# Altium PCB lab1.PcbDoc
Units mm, origin at the board's own origin, x right, y up, seen from the top; angles counter-clockwise.
Board outline 50 x 40 mm, 4 copper layers (Top Layer, GND1, GND2, Bottom Layer), stack 1.527 mm thick; 34 components, 13 nets, 74 pads, 402 vias.
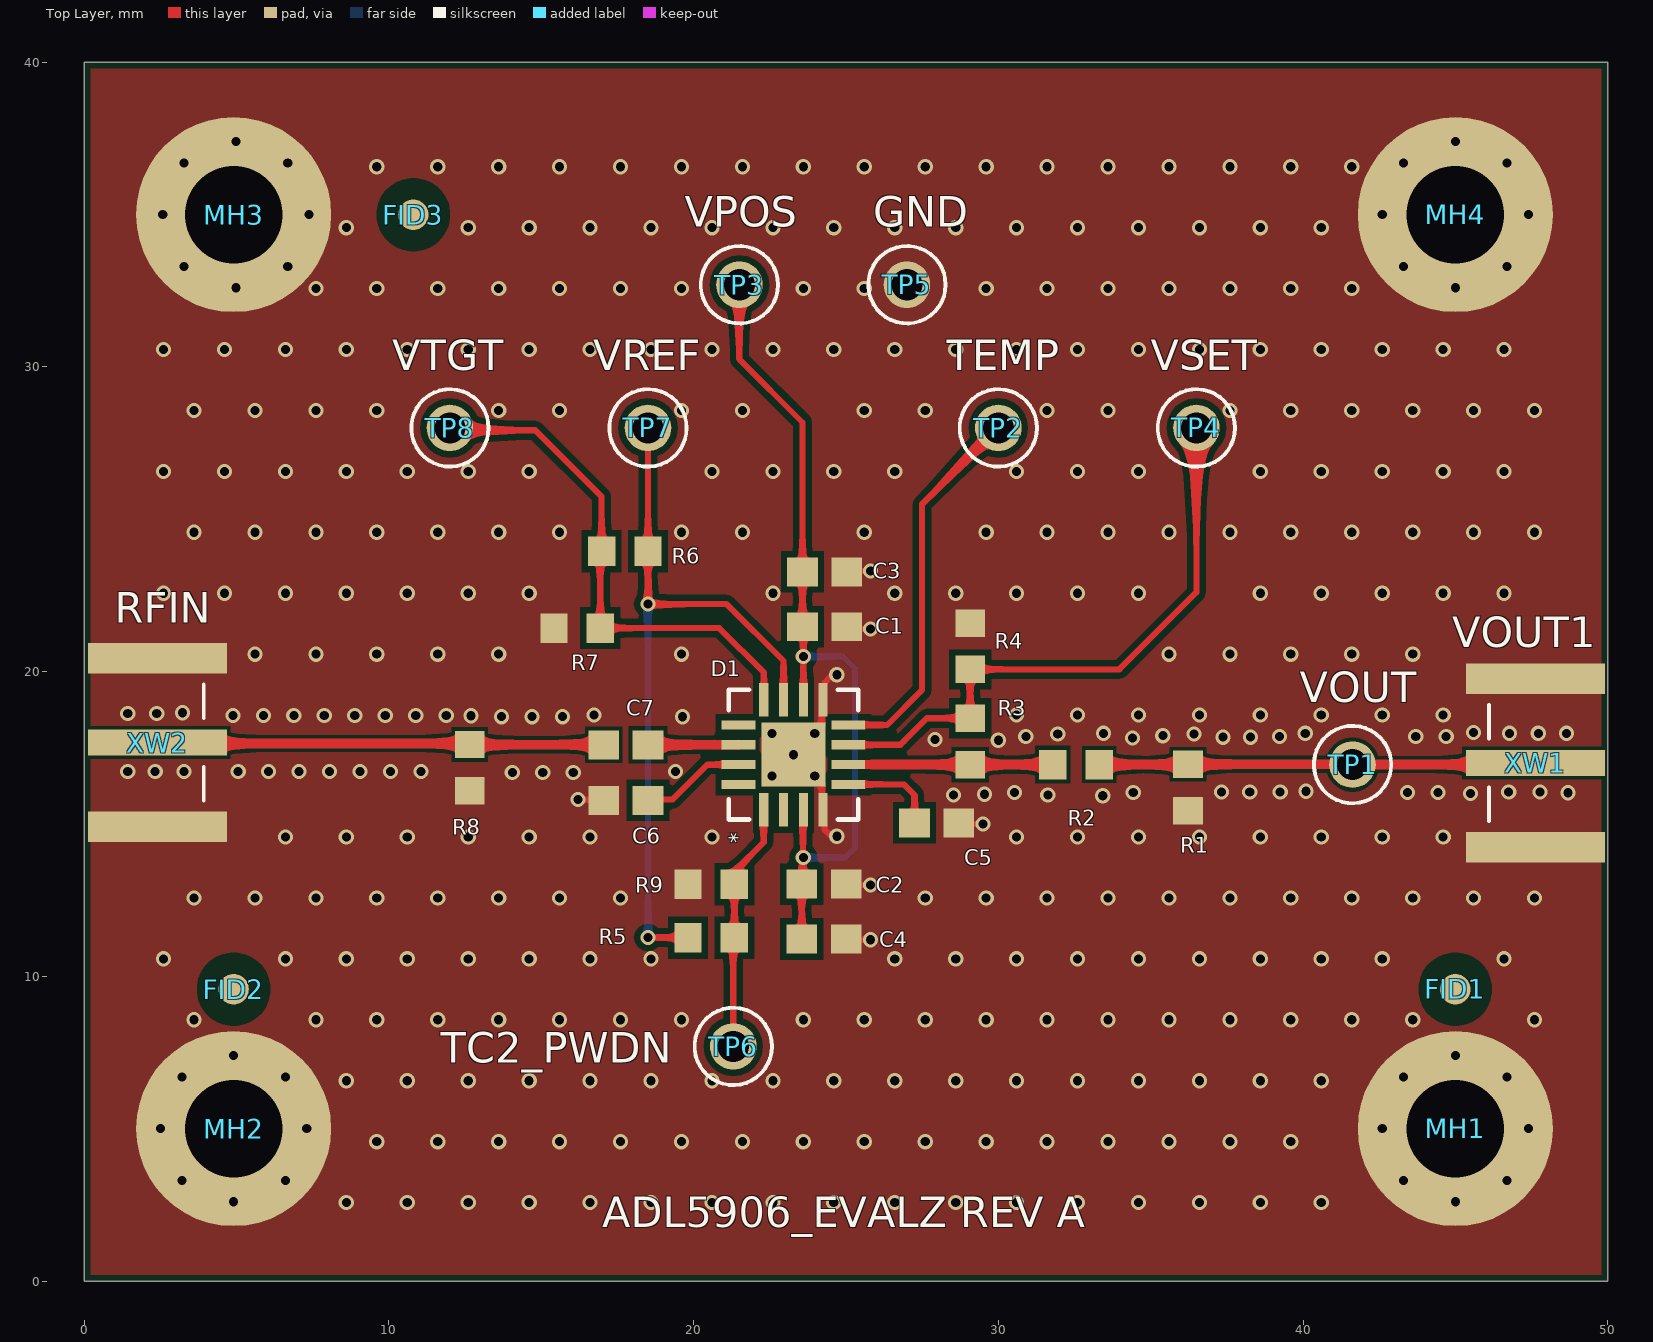
[diagram p0: Top Layer view]
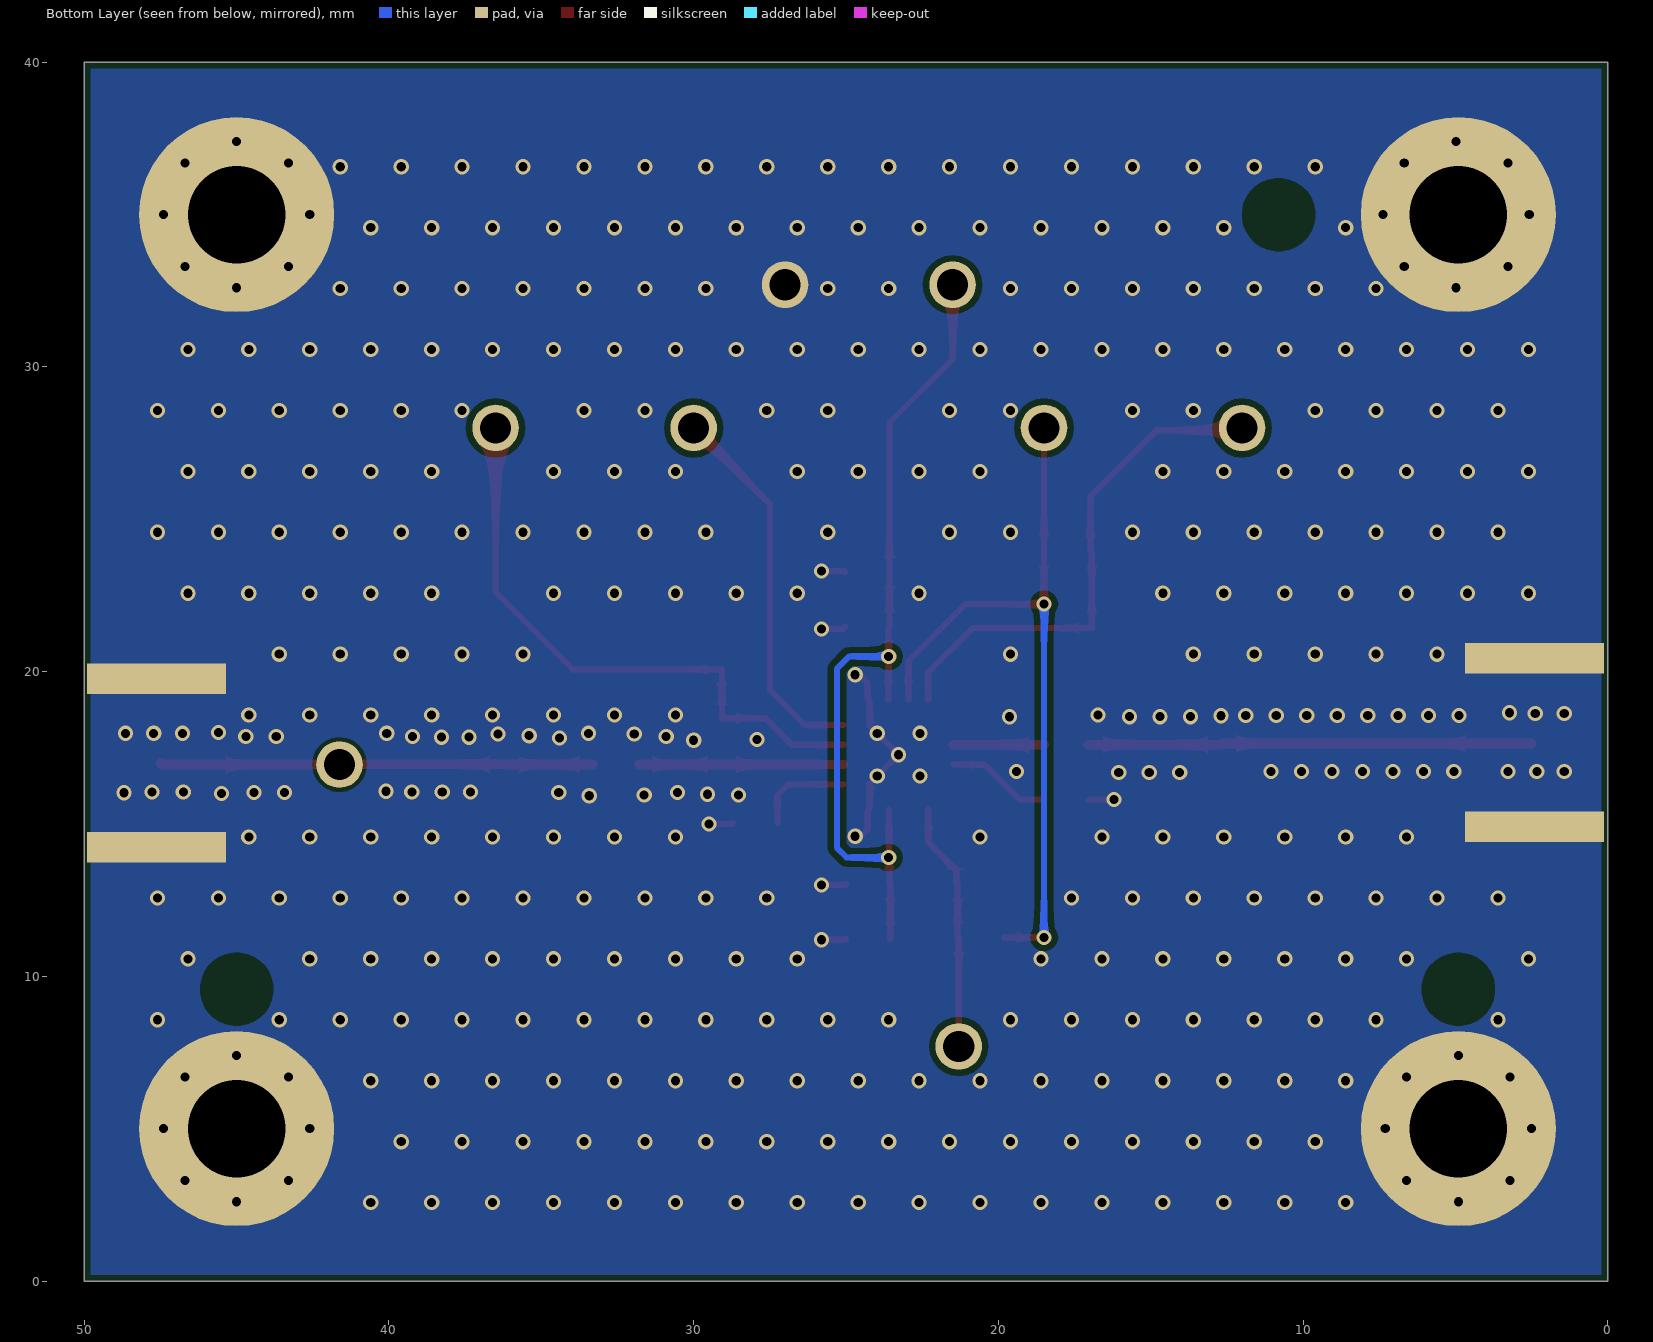
[diagram p1: Bottom Layer view, seen from below]
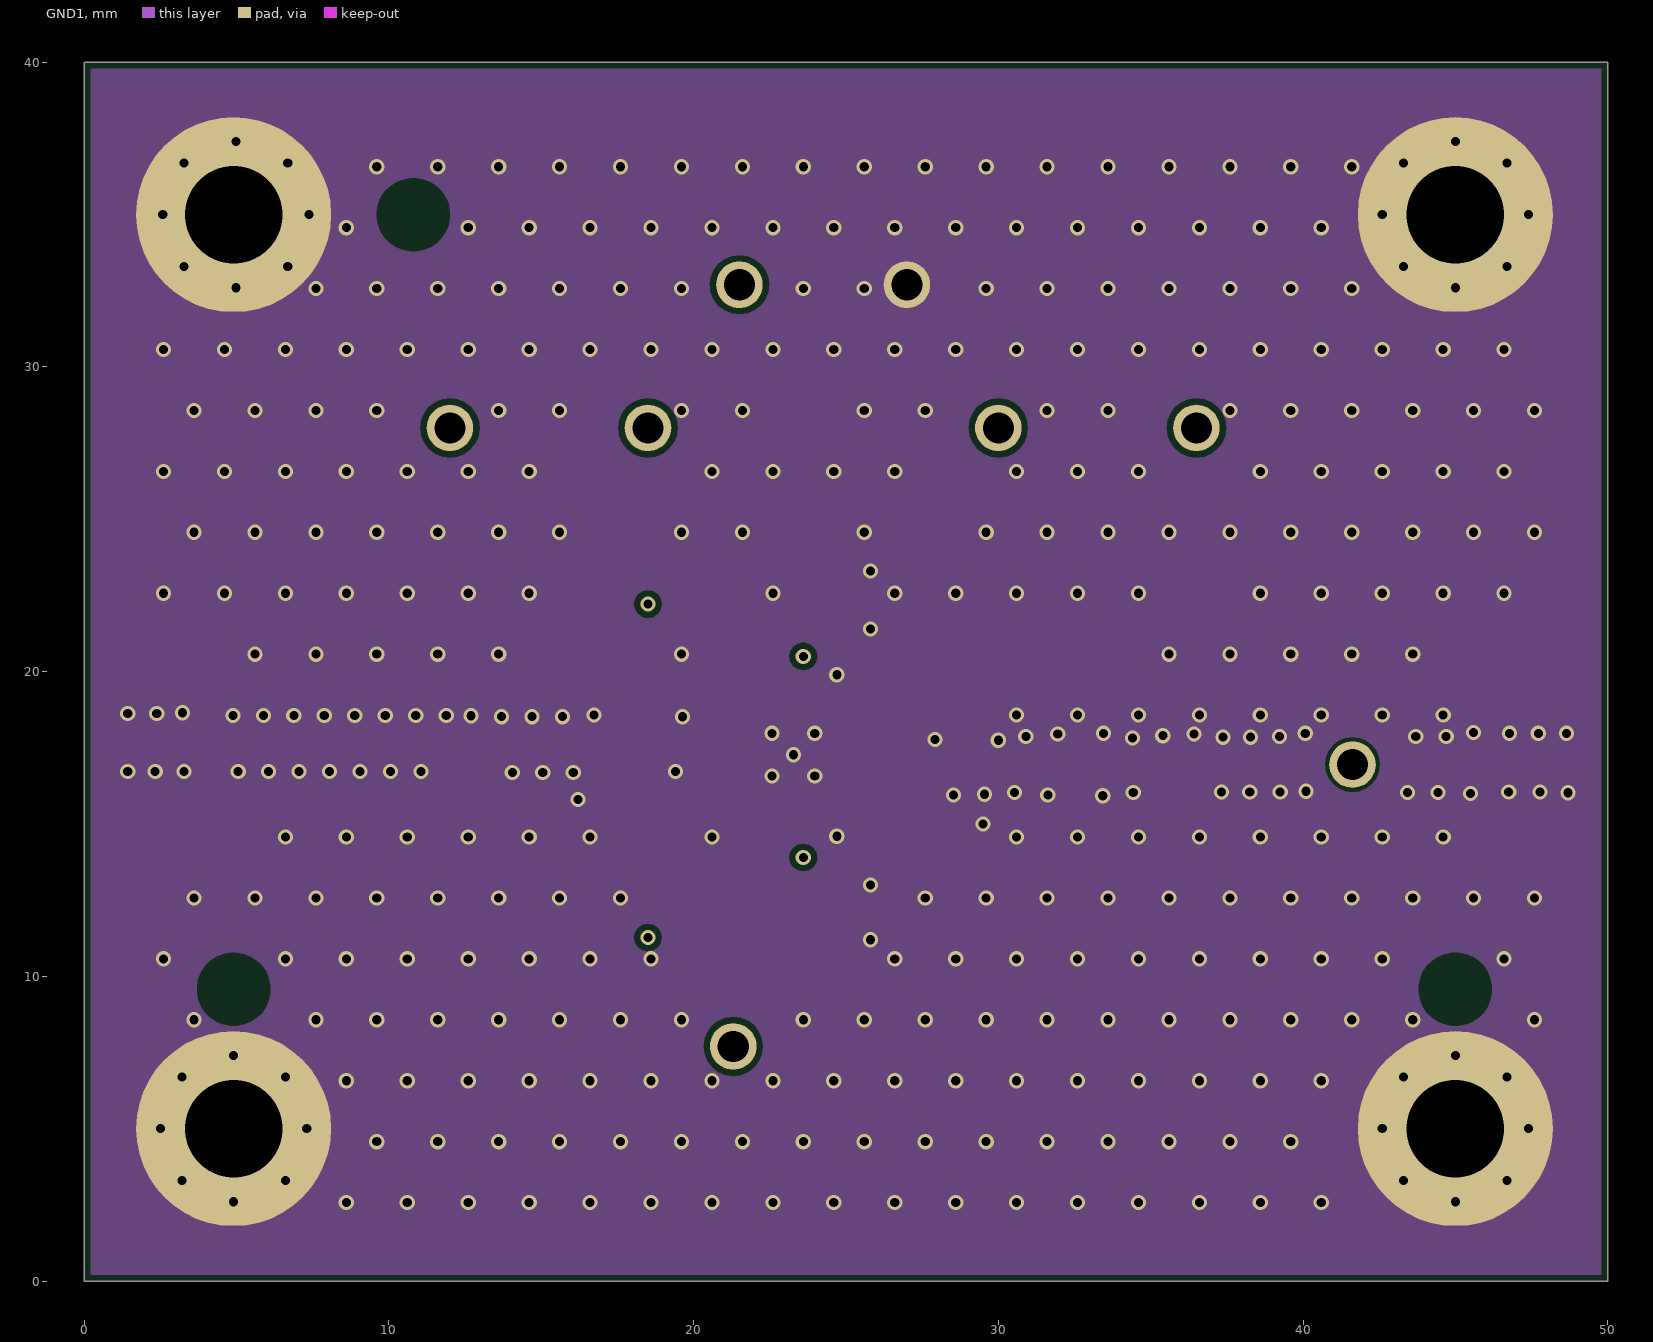
[diagram p2: GND1]
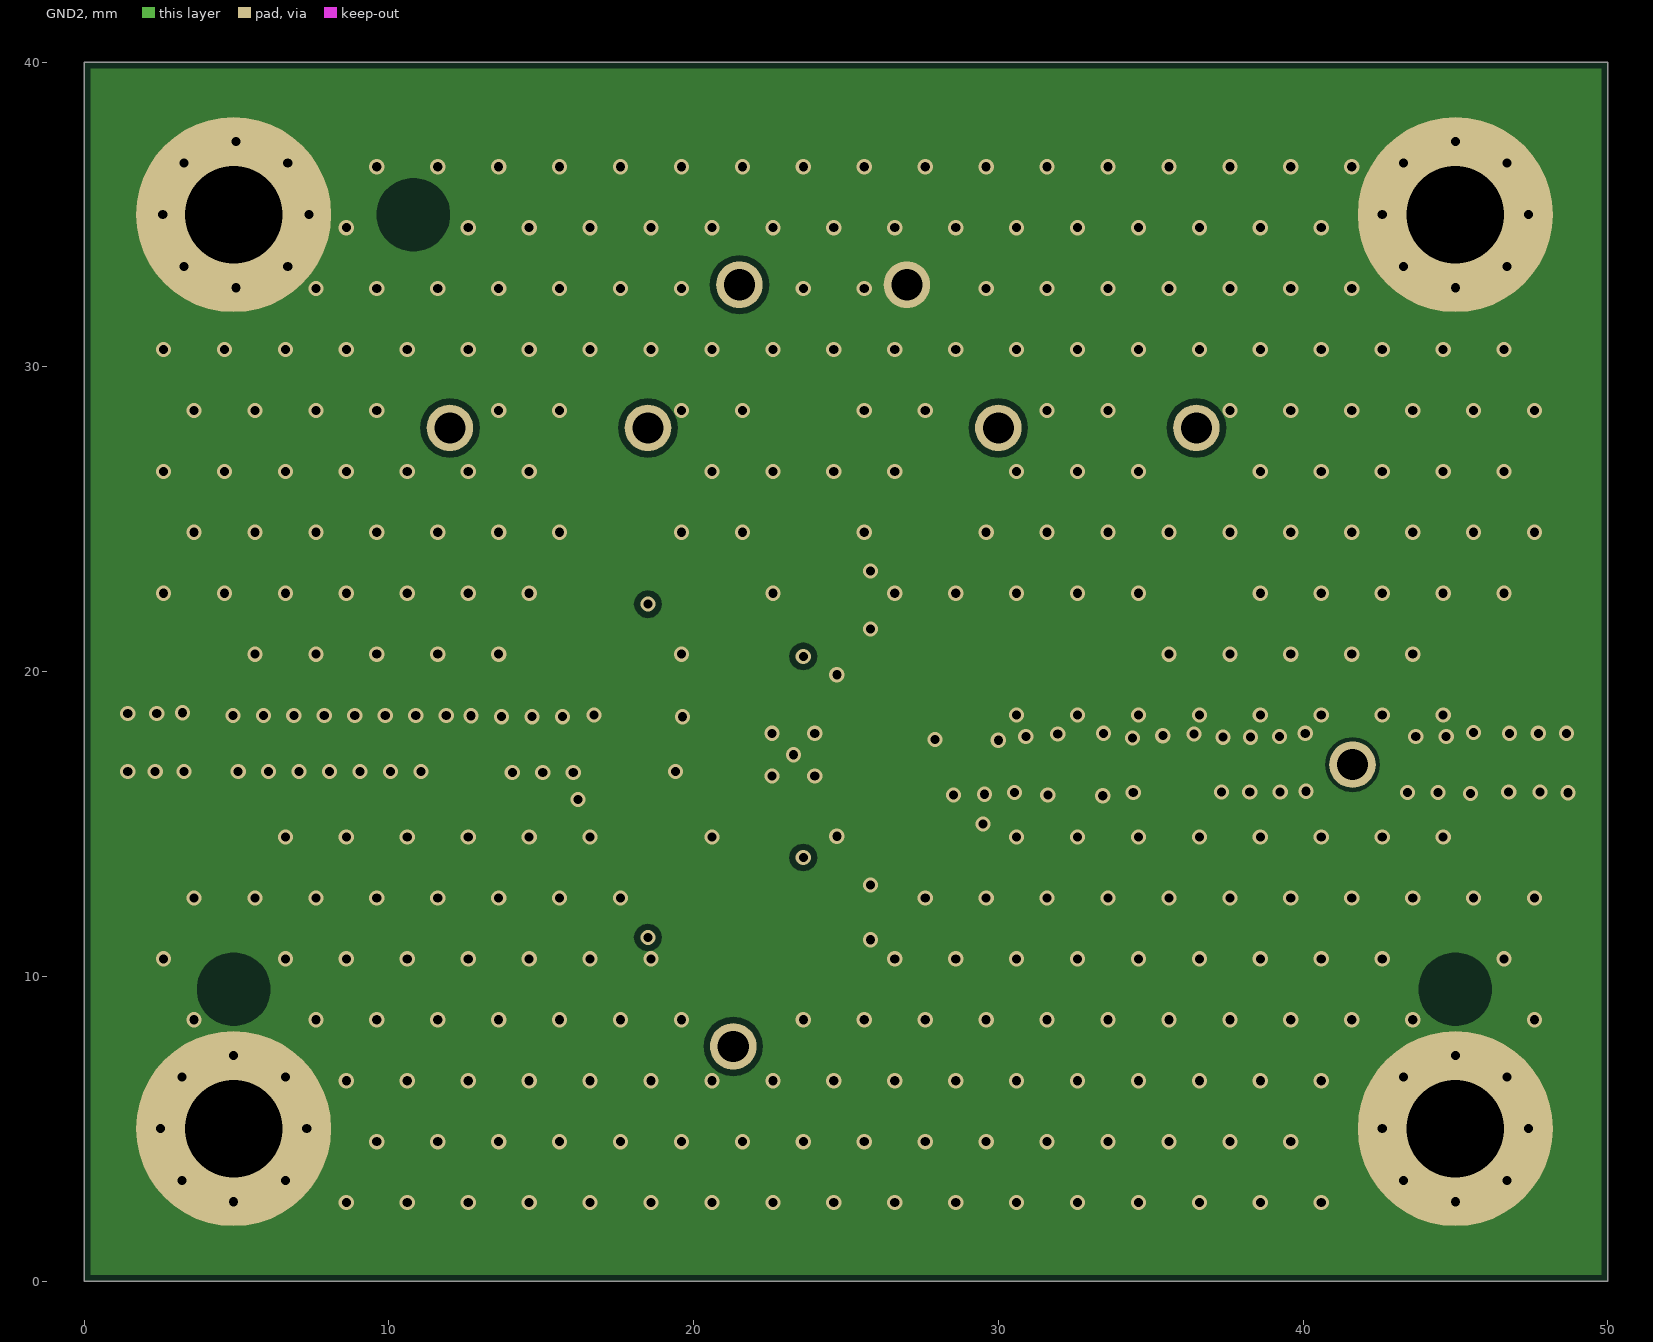
[diagram p3: GND2]
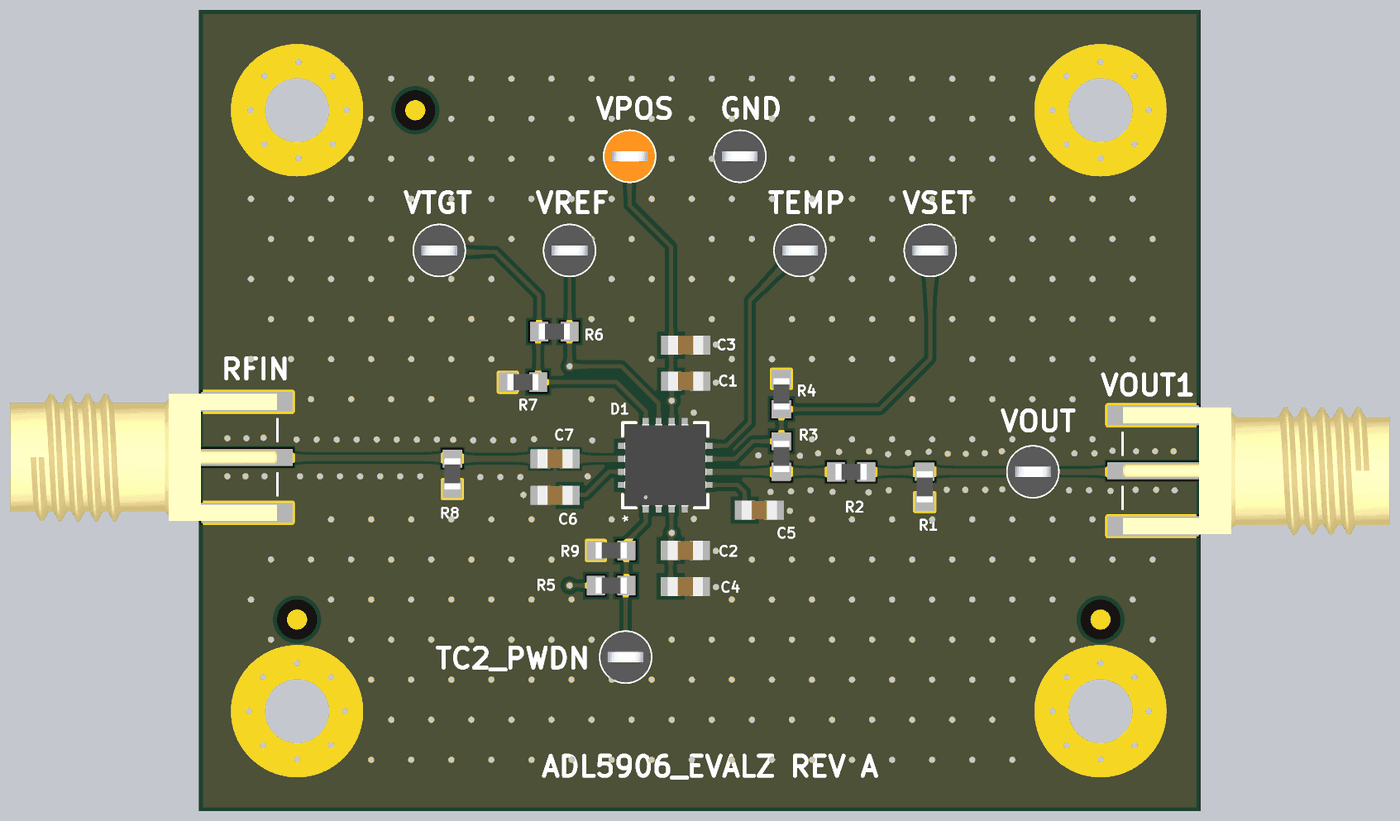
[diagram p4: 3D render of the assembled board from above, using the file's embedded part models]

## Layer stack, top to bottom
Top Solder: solder mask 0.0102, Solder Resist, Dk 3.5
Top Layer: signal copper 0.053
Dielectric 2: core 0.2032, R04003C, Dk 3.38
GND1: signal copper 0.035
Dielectric 1: core 0.9448, FR-4, Dk 3.8
GND2: signal copper 0.035
Dielectric 3: core 0.2032, R04003C, Dk 3.38
Bottom Layer: signal copper 0.053
Bottom Solder: solder mask 0.0102, Solder Resist, Dk 3.5

## Board outline
0,0 50,0 50,40 0,40

## Design rules (kind name [scope] priority, off if disabled: settings)
BoardOutlineClearance [All] p1: gap=0.2 ignorepadtopadclearanceinfootprint=FALSE except(0.09: SMDPad-OutlineEdge)
Clearance Clearance_50Ohm [InNetClass('50 Ohm')] p1: gap=0.127 ignorepadtopadclearanceinfootprint=TRUE
Clearance [All] p2: gap=0.2 ignorepadtopadclearanceinfootprint=TRUE
ComponentClearance [All] p1: gap=0 collisioncheckmode=3 verticalgap=0 showdistances=FALSE
HoleSize [All] p1: absolutevalues=TRUE maxlimit=5 minlimit=0.3 maxpercent=80.000 minpercent=20.000
MinimumSolderMaskSliver [All] p1: minsoldermaskwidth=0
PolygonConnect [All] p1: connectstyle=Direct reliefconductorwidth=0.254 reliefentries=4 polygonreliefangle="90 Angle" airgapwidth=0.254
RoutingVias [All] p1: holewidth=0.5 width=1 viastyle="Through Hole" minholewidth=0.3 minwidth=0.5 maxholewidth=2 maxwidth=3
SolderMaskExpansion [All] p1: expansion=0.102 istentingtop=FALSE
Width Width_50Ohm [InNetClass('50 Ohm')] p1: maxlimit=0.319 minlimit=0.299 preferedwidth=0.319 impedanceprofiledriven=TRUE impedanceprofileid={6ED3B86D-760E-42CB-A985-9C33CF35A73C} impedanceprofilevalue=50.000000 minimp=50.000000 maximp=50.000000 favimp=50.000000
Width [All] p2: maxlimit=1 minlimit=0.15 preferedwidth=0.2
27 further rules are at their usual default settings.

## Classes and differential pairs
net class "50 Ohm": NetC7_1 NetC7_2 NetD1_6 VOUT

## Components (designator, comment, footprint, x,y, rotation, side; value= is the part's Value field where it differs from the comment)
C1 "CAP_0603_0.1uF" CAP_0603_0.1uF 24.3,21.475 r180 top value=0.1мкФ
C2 "CAP_0603_0.1uF" CAP_0603_0.1uF 24.275,13.025 r180 top value=0.1мкФ
C3 "CAP_0603_100pF" CAP_0603_100pF 24.3,23.275 r180 top value=100пФ
C4 "CAP_0603_100pF" CAP_0603_100pF 24.275,11.225 r180 top value=100пФ
C5 "CAP_0603_0.1uF" CAP_0603_0.1uF 27.975,15.035 r180 top value=0.1мкФ
C6 "CAP_0603_10nF" CAP_0603_10nF 17.775,15.775 r0 top value=10нФ
C7 "CAP_0603_10nF" CAP_0603_10nF 17.775,17.6 r0 top value=10нФ
D1 "ADL5906SCPZN-R7" ADL5906SCPZN-R7 23.275,17.275 r90 top
FID1 "Fiducial" "FIDUCIAL 1mm" 45,9.575 r90 top
FID2 "Fiducial" "FIDUCIAL 1mm" 4.9,9.575 r90 top
FID3 "Fiducial" "FIDUCIAL 1mm" 10.8,35 r90 top
MH1 "Mounting Hole M3" "Mounting Hole M3"#1 45,5 r0 top
MH2 "Mounting Hole M3" "Mounting Hole M3"#1 4.9,5 r0 top
MH3 "Mounting Hole M3" "Mounting Hole M3"#2 4.975,35 r0 top
MH4 "Mounting Hole M3" "Mounting Hole M3"#1 45,35 r0 top
R1 "RES_0603 0Ohm" "RES_0603 0Ohm" 36.225,16.2 r90 top value=0Ом
R2 "RES_0603 0Ohm" "RES_0603 0Ohm" 32.55,16.95 r180 top value=0Ом
R3 "RES_0603 0Ohm" "RES_0603 0Ohm" 29.075,17.71 r90 top value=0Ом
R4 "RES_0603 0Ohm" "RES_0603 0Ohm" 29.075,20.835 r270 top value=0Ом
R5 "RES_0603 1.5kOhm" "RES_0603 1.5kOhm" 20.575,11.27 r0 top value=1.5кОм
R6 "RES_0603 3.74kOhm" "RES_0603 3.74kOhm" 17.74,23.95 r0 top value=3.74кОм
R7 "RES_0603 2kOhm" "RES_0603 2kOhm" 16.175,21.43 r180 top value=2кОм
R8 "RES_0603 60.4Ohm" "RES_0603 60.4Ohm" 12.65,16.85 r270 top value=60.4Ом
R9 "RES_0603 270Ohm" "RES_0603 270Ohm" 20.575,13.025 r0 top value=270Ом
TP1 "Test point" "TEST POINT BLACK" 41.625,16.95 r0 top
TP2 "Test point" "TEST POINT BLACK" 30,28 r0 top
TP3 "Test point" "TEST POINT ORANGE" 21.5,32.7 r0 top
TP4 "Test point" "TEST POINT BLACK" 36.5,28 r0 top
TP5 "Test point" "TEST POINT BLACK" 27,32.7 r0 top
TP6 "Test point" "TEST POINT BLACK" 21.3,7.7 r0 top
TP7 "Test point" "TEST POINT BLACK" 18.5,28 r0 top
TP8 "Test point" "TEST POINT BLACK" 12,28 r0 top
XW1 "EMPCB.SMAFSTJ.B.HT" EMPCB.SMAFSTJ.B.HT 47.625,17 r90 top
XW2 "EMPCB.SMAFSTJ.B.HT" EMPCB.SMAFSTJ.B.HT 2.4,17.675 r270 top

## Footprints (in the part's own frame and the unit in brackets; to place one, negate y for a bottom-side part, rotate by r counter-clockwise, add the part's x,y. Pads: shape width x height; smd on the part's side, far side on the other; paste and mask are expansions set on the pad)
ADL5906SCPZN-R7 [mm]
  rect 1.105x0.299 smd paste+0 mask+0: 1(-1.802,0.975) 2(-1.802,0.325) 3(-1.802,-0.325) 4(-1.802,-0.975) 9(1.802,-0.975) 10(1.802,-0.325) 11(1.802,0.325) 12(1.802,0.975)
  rect 0.299x1.105 smd paste+0 mask+0: 5(-0.975,-1.802) 6(-0.325,-1.802) 7(0.325,-1.802) 8(0.975,-1.802) 13(0.975,1.802) 14(0.325,1.802) 15(-0.325,1.802) 16(-0.975,1.802)
  rect 2.1x2.1 smd paste+0 mask+0: 17(0,0)
  silkscreen extent -2.13,-2.13 2.13,2.13, body extent -2.05,-2.05 2.05,2.05, height 0.8
CAP_0603_0.1uF [mm]
  rect 1.006x0.95 smd paste+0 mask+0: 1(-0.728,0) 2(0.728,0)
  body extent -0.87,-0.47 0.88,0.48, height 0.95
CAP_0603_10nF [mm]
  rect 1.006x0.95 smd paste+0 mask+0: 1(-0.728,0) 2(0.728,0)
  body extent -0.87,-0.47 0.88,0.48, height 0.87
CAP_0603_100pF [mm]
  rect 1.006x0.95 smd paste+0 mask+0: 1(-0.728,0) 2(0.728,0)
  body extent -0.87,-0.47 0.88,0.48, height 0.87
EMPCB.SMAFSTJ.B.HT [mm]
  rect 0.85x4.56 smd: 1(0,0)
  rect 1x4.56 smd: 2(-2.77,0) 3(2.77,0)
  rect 1x4.56 smd far side: 4(-2.77,0) 5(2.77,0)
  silkscreen extent -1.9,1.52 1.9,1.52, body extent -3.19,-11.8 3.19,1.5, height 3.58
"FIDUCIAL 1mm" [mm]
  round 1 smd paste-1 mask+0.5: 1(0,0)
  Multi-Layer pour cut-out: 0,-1.2 -0.459,-1.109 -0.849,-0.849 -1.109,-0.459 -1.2,0 -1.2,0 -1.039,0.6 -0.6,1.039 0,1.2 0,1.2 0.459,1.109 0.849,0.849 1.109,0.459 1.2,0 1.2,0 1.109,-0.459 0.849,-0.849 0.459,-1.109 0,-1.2
"Mounting Hole M3"#1 [mm]
  round 6.4 hole 3.2 mask+0.1: 1(0,0)
"Mounting Hole M3"#2 [mm]
  round 6.4 hole 3.2 mask+0.1: 1(-0.075,0)
"RES_0603 0Ohm" [mm]
  rect 0.9x0.97 smd: 1(-0.76,0) 2(0.76,0)
  body extent -0.77,-0.4 0.78,0.4, height 0.55
"RES_0603 1.5kOhm" [mm]
  rect 0.9x0.97 smd: 1(-0.76,0) 2(0.76,0)
  body extent -0.77,-0.4 0.78,0.4, height 0.56
"RES_0603 2kOhm" [mm]
  rect 0.9x0.97 smd: 1(-0.76,0) 2(0.76,0)
  body extent -0.77,-0.4 0.78,0.4, height 0.56
"RES_0603 3.74kOhm" [mm]
  rect 0.9x0.97 smd: 1(-0.76,0) 2(0.76,0)
  body extent -0.77,-0.4 0.78,0.4, height 0.56
"RES_0603 60.4Ohm" [mm]
  rect 0.9x0.97 smd: 1(-0.76,0) 2(0.76,0)
  body extent -0.77,-0.4 0.78,0.4, height 0.56
"RES_0603 270Ohm" [mm]
  rect 0.9x0.97 smd: 1(-0.76,0) 2(0.76,0)
  body extent -0.77,-0.4 0.78,0.4, height 0.56
"TEST POINT BLACK" [mm]
  round 1.53 hole 1.02: 1(0,0)
  silkscreen extent -1.27,-1.27 1.27,1.27, body extent -1.27,-1.27 1.27,1.27, height 4.58
"TEST POINT ORANGE" [mm]
  round 1.53 hole 1.02: 1(0,0)
  silkscreen extent -1.27,-1.27 1.27,1.27, body extent -1.27,-1.27 1.27,1.27, height 4.58

## Part data
C1 C2 C5: "C0603C104K5RAC7867", Dielectric=X7R, Manufacturer=KEMET, Max Operating Temperature=125, Min Operating Temperature=-55, Package=0603, Part Number=399-C0603C104K5RAC7867DKR-ND, Tolerance=±10%, Voltage=50В, Mount=SMT, Number of Pins=2, Type="Конденсатор керамічний"
C3 C4: "C0603C101K5GAC7867", Dielectric=X7R, Manufacturer=KEMET, Max Operating Temperature=125, Min Operating Temperature=-55, Package=0603, Part Number=399-C0603C101K5GAC7867DKR-ND, Tolerance=±10%, Voltage=50В, Mount=SMT, Number of Pins=2, Type="Конденсатор керамічний"
C6 C7: "C0603C103K5RAC7867", Dielectric=X7R, Manufacturer=KEMET, Max Operating Temperature=125, Min Operating Temperature=-55, Package=0603, Part Number=399-C0603C103K5RAC7867DKR-ND, Tolerance=±10%, Voltage=50В, Mount=SMT, Number of Pins=2, Type="Конденсатор керамічний"
D1: "IC RF DETECT 10MHZ-10GHZ 16CSP", Manufacturer="Analog Devices Inc.", Max Operating Temperature=+85°C, Min Operating Temperature=0°C, Package="16-WQFN Exposed Pad", Mount=SMT, Number of Pins=16, Part Number=ADL5906SCPZN-R7
FID1 FID2 FID3: library part "FIDUCIAL 1mm", "Fiducial 1mm Pad"
R1 R2 R3 R4: "RES 0 OHM JUMPER 1/10W 0603", Manufacturer="Stackpole Electronics Inc", Max Operating Temperature=+155°C, Min Operating Temperature=-55°C, Package=0603, Part Number=RMCF0603ZT0R00DKR-ND, Power Rating="1/10 Вт", Tolerance=±1%, Mount=SMT, Number of Pins=2, Type=Резистор
R5: "RES 1.5K OHM 1% 1/10W 0603", Manufacturer="Stackpole Electronics Inc", Max Operating Temperature=+155°C, Min Operating Temperature=-55°C, Package=0603, Part Number=RMCF0603FT1K50DKR-ND, Power Rating="1/10 Вт", Tolerance=±1%, Mount=SMT, Number of Pins=2, Type=Резистор
R6: "RES 3.74K OHM 1% 1/10W 0603", Manufacturer="Stackpole Electronics Inc", Max Operating Temperature=+155°C, Min Operating Temperature=-55°C, Package=0603, Part Number=RMCF0603FT60R4DKR-ND, Power Rating="1/10 Вт", Tolerance=±1%, Mount=SMT, Number of Pins=2, Type=Резистор
R7: "RES 2K OHM 1% 1/10W 0603", Manufacturer="Stackpole Electronics Inc", Max Operating Temperature=+155°C, Min Operating Temperature=-55°C, Package=0603, Part Number=RMCF0603FT2K00DKR-ND, Power Rating="1/10 Вт", Tolerance=±1%, Mount=SMT, Number of Pins=2, Type=Резистор
R8: "RES 60.4 OHM 1% 1/10W 0603", Manufacturer="Stackpole Electronics Inc", Max Operating Temperature=+155°C, Min Operating Temperature=-55°C, Package=0603, Part Number=RMCF0603FT60R4DKR-ND, Power Rating="1/10 Вт", Tolerance=±1%, Mount=SMT, Number of Pins=2, Type=Резистор
R9: "RES 270 OHM 1% 1/10W 0603", Manufacturer="Stackpole Electronics Inc", Max Operating Temperature=+155°C, Min Operating Temperature=-55°C, Package=0603, Part Number=RMCF0603FT270RDKR-ND, Power Rating="1/10 Вт", Tolerance=±1%, Mount=SMT, Number of Pins=2, Type=Резистор
TP1 TP2 TP4 TP5 TP6 TP7 TP8: library part "TEST POINT BLACK", "PC TEST POINT MINIATURE BLACK"
TP3: library part "TEST POINT ORANGE", "PC TEST POINT MINIATURE ORANGE"
XW1 XW2: "50 Ω, side launch SMA connectors", Manufacturer="Taoglas Limited", Max Operating Temperature=+85°C, Min Operating Temperature=-40°C, Mount=SMT, Number of Pins=2, Part Number=EMPCB.SMAFSTJ.B.HT, Type="Female Socket"

## Via types
v1: diameter 0.5, hole 0.3, Top Layer to Bottom Layer, tented both sides, 370 vias
v2: diameter 0.6/0.6/0.6/0.6 (per signal layer), hole 0.3, Top Layer to Bottom Layer, tented both sides, 32 vias

## Nets (pads, with @x,y where several pads share a name; then routed paths per layer and width w, separated by ;. In a path a pad name is that pad's centre, name@x,y a point inside that pad or via, vN(x,y) a via of type N, cw(c..) or ccw(c..) an arc to the next point about the centre after c; other vN are vias at no path point)
GND: C1.1 C2.1 C3.1 C4.1 C5.1 C6.1 D1.4 D1.9 D1.17 MH1.1 MH2.1 MH3.1 MH4.1 R1.1 R4.1 R7.2 R8.2 R9.1 TP5.1 XW1.2 XW1.3 XW1.4 XW1.5 XW2.2 XW2.3 XW2.4 XW2.5 | length 11.5
  Top Layer w0.2: v1(16.2,15.8) 17.022,15.8 C6.1 ; v1(24.7,14.6) 24.643,14.657 24.455,14.657 24.3,14.812 24.3,14.903 24.3,15.423 24.225,15.498 24.225,16.325 v1(23.975,16.575) v1(23.275,17.275) 24.225,18.225 24.225,19.052 24.3,19.127 24.3,19.637 24.505,19.843 24.643,19.843 v1(24.7,19.9) ; C4.1 25.028,11.2 v1(25.8,11.2) ; C2.1 25.028,13 v1(25.8,13) ; C1.1 25.103,21.4 v1(25.8,21.4) ; C3.1 25.053,23.3 v1(25.8,23.3) ; C5.1 28.738,15 v1(29.5,15)
  other v1: 8.6,2.574 10.6,2.574 12.6,2.574 14.6,2.574 16.6,2.574 18.6,2.574 20.6,2.574 22.6,2.574 24.6,2.574 26.6,2.574 28.6,2.574 30.6,2.574 32.6,2.574 34.6,2.574 36.6,2.574 38.6,2.574 40.6,2.574 9.6,4.574 11.6,4.574 13.6,4.574 15.6,4.574 17.6,4.574 19.6,4.574 21.6,4.574 23.6,4.574 25.6,4.574 27.6,4.574 29.6,4.574 31.6,4.574 33.6,4.574 35.6,4.574 37.6,4.574 39.6,4.574 8.6,6.574 10.6,6.574 12.6,6.574 14.6,6.574 16.6,6.574 18.6,6.574 20.6,6.574 22.6,6.574 24.6,6.574 26.6,6.574 28.6,6.574 30.6,6.574 32.6,6.574 34.6,6.574 36.6,6.574 38.6,6.574 40.6,6.574 3.6,8.574 7.6,8.574 9.6,8.574 11.6,8.574 13.6,8.574 15.6,8.574 17.6,8.574 19.6,8.574 23.6,8.574 25.6,8.574 27.6,8.574 29.6,8.574 31.6,8.574 33.6,8.574 35.6,8.574 37.6,8.574 39.6,8.574 41.6,8.574 43.6,8.574 47.6,8.574 2.6,10.574 6.6,10.574 8.6,10.574 10.6,10.574 12.6,10.574 14.6,10.574 16.6,10.574 18.6,10.574 26.6,10.574 28.6,10.574 30.6,10.574 32.6,10.574 34.6,10.574 36.6,10.574 38.6,10.574 40.6,10.574 42.6,10.574 46.6,10.574 3.6,12.574 5.6,12.574 7.6,12.574 9.6,12.574 11.6,12.574 13.6,12.574 15.6,12.574 17.6,12.574 27.6,12.574 29.6,12.574 31.6,12.574 33.6,12.574 35.6,12.574 37.6,12.574 39.6,12.574 41.6,12.574 43.6,12.574 45.6,12.574 47.6,12.574 6.6,14.574 8.6,14.574 10.6,14.574 12.6,14.574 14.6,14.574 16.6,14.574 20.6,14.574 30.6,14.574 32.6,14.574 34.6,14.574 36.6,14.574 38.6,14.574 40.6,14.574 42.6,14.574 44.6,14.574 33.425,15.925 28.525,15.95 31.625,15.95 29.55,15.975 45.5,16 30.532,16.031 34.43,16.031 43.429,16.031 44.429,16.031 48.7,16.025 37.325,16.05 38.25,16.05 39.25,16.05 46.75,16.05 47.775,16.05 40.1,16.075 22.575,16.575 14.048,16.686 15.048,16.686 16.048,16.686 1.425,16.725 2.325,16.725 3.275,16.725 5.049,16.724 6.049,16.724 7.049,16.724 8.049,16.724 9.049,16.724 10.049,16.724 11.049,16.724 19.4,16.725 30,17.75 27.925,17.775 34.4,17.825 37.375,17.85 38.275,17.85 30.903,17.869 39.225,17.875 43.699,17.869 44.699,17.869 35.4,17.9 31.95,17.95 36.425,17.95 22.575,17.975 23.975,17.975 33.45,17.975 40.075,17.975 46.775,17.975 47.725,17.975 48.65,17.975 45.6,18 13.691,18.524 14.691,18.524 15.691,18.524 19.633,18.519 12.691,18.552 4.877,18.561 5.877,18.561 6.877,18.561 7.877,18.561 8.877,18.561 9.877,18.561 10.877,18.561 11.877,18.561 16.725,18.575 30.6,18.574 32.6,18.574 34.6,18.574 36.6,18.574 38.6,18.574 40.6,18.574 42.6,18.574 44.6,18.574 1.425,18.625 2.375,18.625 3.225,18.65 5.6,20.574 7.6,20.574 9.6,20.574 11.6,20.574 13.6,20.574 19.6,20.574 35.6,20.574 37.6,20.574 39.6,20.574 41.6,20.574 43.6,20.574 2.6,22.574 4.6,22.574 6.6,22.574 8.6,22.574 10.6,22.574 12.6,22.574 14.6,22.574 22.6,22.574 26.6,22.574 28.6,22.574 30.6,22.574 32.6,22.574 34.6,22.574 38.6,22.574 40.6,22.574 42.6,22.574 44.6,22.574 46.6,22.574 3.6,24.574 5.6,24.574 7.6,24.574 9.6,24.574 11.6,24.574 13.6,24.574 15.6,24.574 19.6,24.574 21.6,24.574 25.6,24.574 29.6,24.574 31.6,24.574 33.6,24.574 35.6,24.574 37.6,24.574 39.6,24.574 41.6,24.574 43.6,24.574 45.6,24.574 47.6,24.574 2.6,26.574 4.6,26.574 6.6,26.574 8.6,26.574 10.6,26.574 12.6,26.574 14.6,26.574 20.6,26.574 22.6,26.574 24.6,26.574 26.6,26.574 30.6,26.574 32.6,26.574 34.6,26.574 38.6,26.574 40.6,26.574 42.6,26.574 44.6,26.574 46.6,26.574 3.6,28.574 5.6,28.574 7.6,28.574 9.6,28.574 13.6,28.574 15.6,28.574 19.6,28.574 21.6,28.574 25.6,28.574 27.6,28.574 31.6,28.574 33.6,28.574 37.6,28.574 39.6,28.574 41.6,28.574 43.6,28.574 45.6,28.574 47.6,28.574 2.6,30.574 4.6,30.574 6.6,30.574 8.6,30.574 10.6,30.574 12.6,30.574 14.6,30.574 16.6,30.574 18.6,30.574 20.6,30.574 22.6,30.574 24.6,30.574 26.6,30.574 28.6,30.574 30.6,30.574 32.6,30.574 34.6,30.574 36.6,30.574 38.6,30.574 40.6,30.574 42.6,30.574 44.6,30.574 46.6,30.574 7.6,32.574 9.6,32.574 11.6,32.574 13.6,32.574 15.6,32.574 17.6,32.574 19.6,32.574 23.6,32.574 25.6,32.574 29.6,32.574 31.6,32.574 33.6,32.574 35.6,32.574 37.6,32.574 39.6,32.574 41.6,32.574 8.6,34.574 12.6,34.574 14.6,34.574 16.6,34.574 18.6,34.574 20.6,34.574 22.6,34.574 24.6,34.574 26.6,34.574 28.6,34.574 30.6,34.574 32.6,34.574 34.6,34.574 36.6,34.574 38.6,34.574 40.6,34.574 9.6,36.574 11.6,36.574 13.6,36.574 15.6,36.574 17.6,36.574 19.6,36.574 21.6,36.574 23.6,36.574 25.6,36.574 27.6,36.574 29.6,36.574 31.6,36.574 33.6,36.574 35.6,36.574 37.6,36.574 39.6,36.574 41.6,36.574
  other v2: 4.9,2.6 45,2.6 3.2,3.3 6.6,3.3 43.3,3.3 46.7,3.3 2.5,5 7.3,5 42.6,5 47.4,5 3.2,6.7 6.6,6.7 43.3,6.7 46.7,6.7 4.9,7.4 45,7.4 4.975,32.6 45,32.6 3.275,33.3 6.675,33.3 43.3,33.3 46.7,33.3 2.575,35 7.375,35 42.6,35 47.4,35 3.275,36.7 6.675,36.7 43.3,36.7 46.7,36.7 4.975,37.4 45,37.4
NetC1_2: C1.2 C2.2 C3.2 C4.2 D1.3 D1.10 TP3.1 | length 28.3
  Top Layer w0.2: TP3.1 21.5,30.25 23.572,28.178 C3.2 C1.2 23.6,21.447 v1(23.6,20.5) D1.10 ; C4.2 C2.2 23.575,13.053 23.575,14.125 23.588,14.138 23.588,15.46 D1.3
  Bottom Layer w0.2: v1(23.6,13.9) 24.978,13.9 25.3,14.222 25.3,20.1 24.9,20.5 v1(23.6,20.5)
NetC5_2: C5.2 D1.5 | length 3.2
  Top Layer w0.2: D1.5 26.9,16.3 27.247,15.953 C5.2
NetC6_2: C6.2 D1.15 | length 3.5
  Top Layer w0.2: C6.2 18.528,15.8 19.3,15.8 20.45,16.95 D1.15
NetC7_1: C7.1 R8.1 XW2.1 | length 14.5
  Top Layer w0.319: XW2.1@2.5,17.642 R8.1@12.618,17.642 ; R8.1@12.655,17.605 C7.1@17.042,17.605
NetC7_2: C7.2 D1.14 | length 3
  Top Layer w0.299: 20.675,17.6 D1.14
  Top Layer w0.319: C7.2 20.675,17.6
NetD1_1: D1.1 R5.2 R9.2 TP6.1 | length 8.1
  Top Layer w0.2: TP6.1 21.3,11.235 R5.2 R9.2 ; R9.2@21.368,13.058 21.368,13.467 22.3,14.4 D1.1
NetD1_6: D1.6 R2.2 R3.1 | length 6.7
  Top Layer w0.299: D1.6 25.85,16.95
  Top Layer w0.319: 25.85,16.95 R3.1 R2.2
NetD1_7: D1.7 R3.2 R4.2 TP4.1 | length 19.8
  Top Layer w0.2: D1.7 26.783,17.6 26.9,17.717 27.653,18.47 R3.2 R4.2 33.975,20.075 36.5,22.6 TP4.1
NetD1_11: D1.11 R5.1 R6.2 TP7.1 | length 24.5
  Top Layer w0.2: v1(18.5,11.275) 19.81,11.275 R5.1 ; TP7.1 R6.2 v1(18.5,22.217) 21.083,22.217 22.95,20.35 D1.11
  Bottom Layer w0.2: v1(18.5,11.275) v1(18.5,22.217)
NetD1_12: D1.12 R6.1 R7.1 TP8.1 | length 17.1
  Top Layer w0.2: TP8.1 12.075,27.925 14.8,27.925 16.98,25.745 R6.1 16.935,23.905 R7.1 20.845,21.43 22.3,19.975 D1.12
VOUT: R1.2 R2.1 TP1.1 XW1.1 | length 14.2
  Top Layer w0.319: R2.1 R1.2@36.225,16.95 ; R1.2 TP1.1@41.625,16.96 ; TP1.1 47.45,16.95 XW1.1@47.5,17
VTEMP: D1.8 TP2.1 | length 12.5
  Top Layer w0.2: D1.8 26.35,18.25 27.5,19.4 27.5,25.5 TP2.1
pads on no net: D1.2 D1.13 D1.16 FID1.1 FID2.1 FID3.1

## Polygon pours and split planes (outlines as drawn)
GND on Top Layer "GND_L01_P000" (solid, remove dead copper, pour order 0): 0,0 50,0 50,40 0,40
GND on GND1 "GND_L02_P001" (solid, remove dead copper, pour order 1): 0,0 50,0 50,40 0,40
GND on Bottom Layer "GND_L04_P002" (solid, remove dead copper, pour order 2): 0,0 50,0 50,40 0,40
GND on GND2 "GND_L03_P003" (solid, remove dead copper, pour order 3): 0,0 50,0 50,40 0,40

## Silkscreen, mask and mechanical layers (free items; w line width, h text height)
Top Overlay:
  text "VPOS" at 19.7,34.6 h1
  text "GND" at 25.9,34.6 h1
  text "VTGT" at 10.1,29.9 h1
  text "VREF" at 16.7,29.9 h1
  text "TEMP" at 28.3,29.9 h1
  text "VSET" at 35,29.9 h1
  text "RFIN" at 1,21.6 h1
  text "VOUT1" at 44.9,20.8 h1
  text "VOUT" at 39.9,19 h1
  text "TC2_PWDN" at 11.7,7.167 h1
  text "ADL5906_EVALZ REV A" at 17,1.767 h1
Board:
  the board outline again, w0.25

## Text inside footprints (layer, text, board x,y; h text height)
D1: Top Overlay "*" at 21.675,14.375 h0.5 r90
XW1: Top Assembly "PCB EDGE" at 49.729,20.807 h0.41 r90
XW2: Top Assembly "PCB EDGE" at 0.296,13.868 h0.41 r270